# Altium PCB LogicsOnly.PcbDoc (part 2 of 3)
Units mm, origin at the board's own origin, x right, y up, seen from the top; angles counter-clockwise.
Board outline 98.85 x 158 mm, 2 copper layers (Top Layer, Bottom Layer); 236 components, 165 nets, 784 pads, 89 vias.
Unrouted connection lines stored in the file: 82.
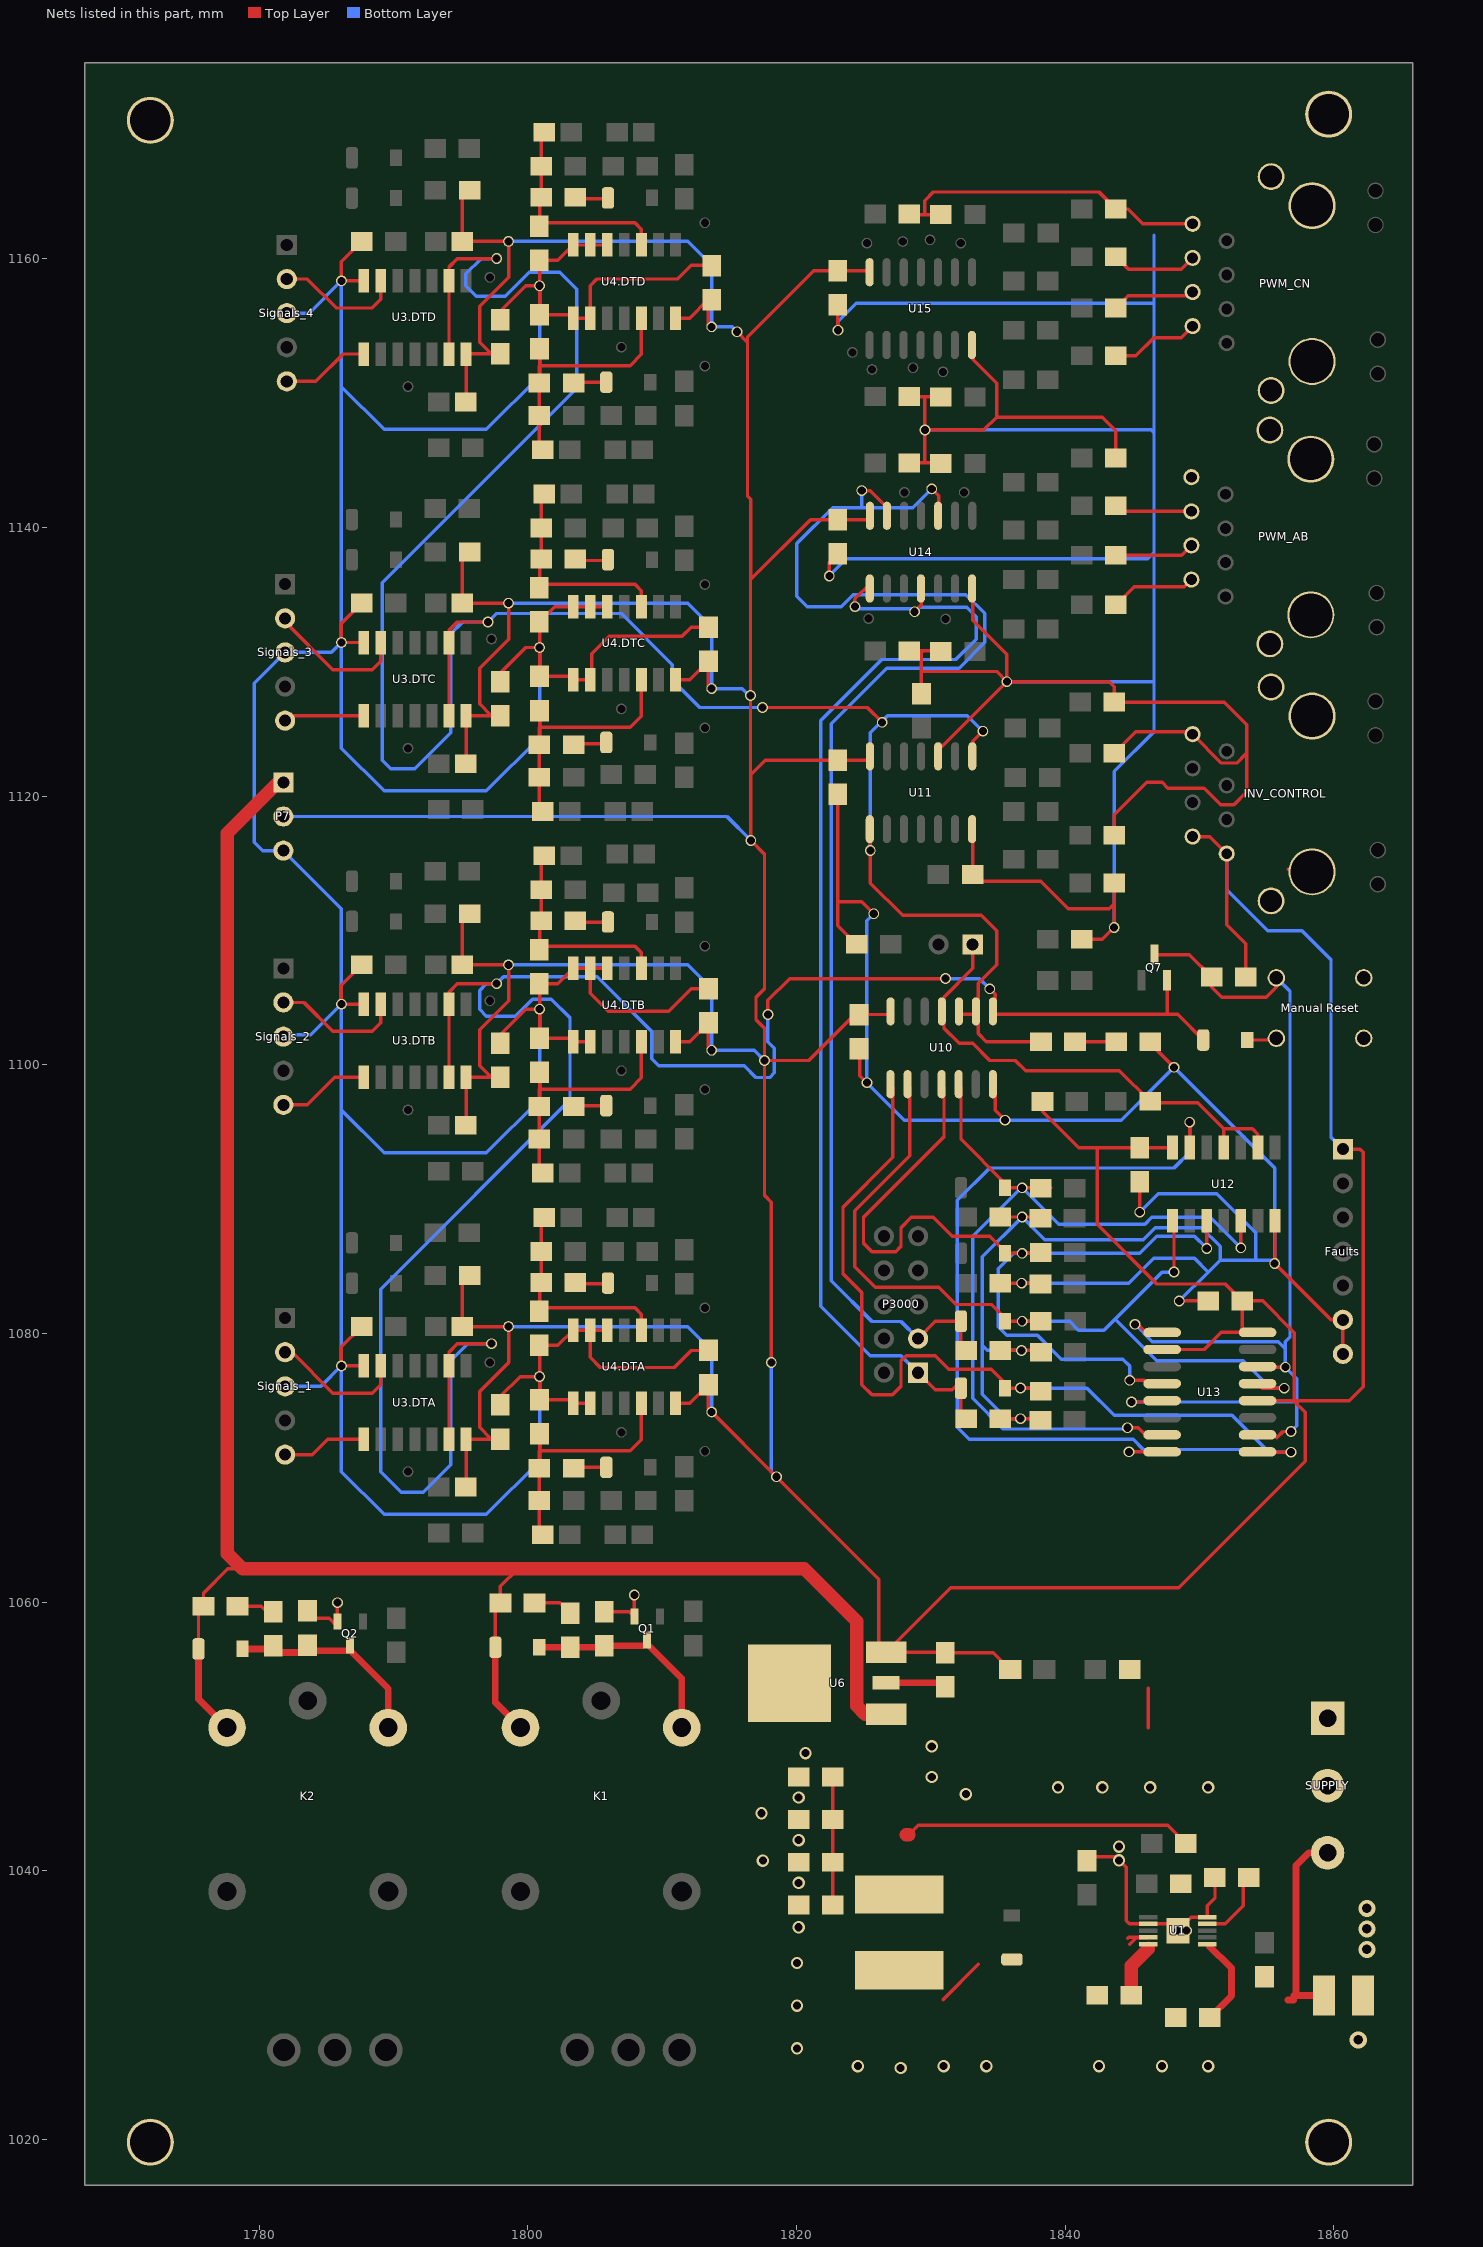
[diagram p2: the nets of this part, all layers, seen from the top]

## Via types
v1: diameter 0.8, hole 0.6, Top Layer to Bottom Layer, 59 vias
v2: diameter 0.914/0.914 (per signal layer), hole 0.6, Top Layer to Bottom Layer, 26 vias
v3: diameter 1.27, hole 0.711, Top Layer to Bottom Layer, 4 vias

## Nets (pads, with @x,y where several pads share a name; then routed paths per layer and width w, separated by ;. In a path a pad name is that pad's centre, name@x,y a point inside that pad or via, vN(x,y) a via of type N, cw(c..) or ccw(c..) an arc to the next point about the centre after c; other vN are vias at no path point)
0: C1.1 C2.1 C3.DTA.2 C3.DTB.2 C3.DTC.2 C3.DTD.2 C4.DTA.2 C4.DTB.2 C4.DTC.2 C4.DTD.2 C5.DTA.2 C5.DTB.2 C5.DTC.2 C5.DTD.2 C6.DTA.2 C6.DTB.2 C6.DTC.2 C6.DTD.2 C7.DTA.2 C7.DTB.2 C7.DTC.2 C7.DTD.2 C10.2 C11.2 C12.2 C35.2 C36.2 C37.2 C38.2 C39.2 C40.2 C42.2 Cin3.2 Cinx1.2 Cout1.2 Css1.2 D26.2 D27.2 D28.2 D29.2 Faults.6 Faults.7 INV_CONTROL.8 P7.3 pad.2 pad.4 PWM_AB.2 PWM_AB.4 PWM_AB.6 PWM_AB.8 PWM_CN.2 PWM_CN.4 PWM_CN.6 PWM_CN.8 Q1.2 Q2.2 R5.1 R12.1 R18.1 R19.1 R20.1 R21.1 R22.1 R23.1 R24.1 R25.1 R26.1 R49.2 R52.1 R53.1 R54.1 R55.1 R56.1 R57.1 R58.1 R59.1 R60.1 R61.1 R62.1 R63.1 R68.1 R69.1 R70.1 R71.1 R72.2 R73.1 Rfb2.2 Rsns1.2 Signals_1.3 Signals_2.3 Signals_3.3 Signals_4.3 SUPPLY.2 U1.5 U1.7 U3.DTA.7 U3.DTB.7 U3.DTC.7 U3.DTD.7 U4.DTA.5 U4.DTA.6 U4.DTA.7 U4.DTA.8 U4.DTA.9 U4.DTB.5 U4.DTB.6 U4.DTB.7 U4.DTB.8 U4.DTB.9 U4.DTC.5 U4.DTC.6 U4.DTC.7 U4.DTC.8 U4.DTC.9 U4.DTD.5 U4.DTD.6 U4.DTD.7 U4.DTD.8 U4.DTD.9 U6.1 U10.7 U11.7 U11.10 U12.7 U13.8 U14.7 U15.7 | length 909.2
  Top Layer w0.254: C2.1@1783.591,1058.808 1785.208,1058.808 1785.826,1058.191 Q2.2@1785.826,1058.571 v1(1785.826,1059.97) v1@1785.826,1060.044 ; C6.DTA.2@1787.64,1080.523 1786.123,1079.006 pad.4@1786.123,1077.592 U3.DTA.7@1787.779,1077.591 ; C6.DTB.2@1787.64,1107.447 1786.123,1105.93 pad.4@1786.123,1104.516 U3.DTB.7@1787.779,1104.515 ; C6.DTC.2@1787.64,1134.371 1786.123,1132.854 pad.4@1786.123,1131.44 U3.DTC.7@1787.779,1131.439 ; C6.DTD.2@1787.64,1161.295 1786.123,1159.778 pad.4@1786.123,1158.364 U3.DTD.7@1787.779,1158.363 ; C3.DTA.2@1797.949,1074.688 1797.949,1075.321 1799.427,1076.8 pad.2@1800.87,1076.8 ; C3.DTB.2@1797.949,1101.612 1797.949,1102.245 1799.848,1104.145 pad.2@1800.87,1104.145 ; C3.DTC.2@1797.949,1128.536 1797.949,1129.169 1799.848,1131.069 pad.2@1800.87,1131.069 ; C3.DTD.2@1797.949,1155.46 1797.949,1156.093 1799.848,1157.993 pad.2@1800.87,1157.993 ; C5.DTA.2@1800.851,1079.119 C5.DTA.2@1800.87,1079.119 ; C5.DTB.2@1800.851,1106.043 C5.DTB.2@1800.87,1106.043 ; C5.DTC.2@1800.851,1132.967 1801.99,1134.106 U4.DTC.7@1803.369,1134.106 U4.DTC.6@1804.639,1134.106 1805.703,1134.106 1805.909,1133.9 U4.DTC.5@1805.909,1134.106 ; C5.DTC.2@1800.87,1132.967 pad.2@1800.87,1131.069 ; U4.DTA.9@1804.639,1074.808 U4.DTA.8@1803.369,1074.808 1803.108,1075.069 C7.DTA.2@1800.87,1075.069 pad.2@1800.87,1076.8 ; U4.DTB.9@1804.639,1101.732 U4.DTB.8@1803.369,1101.732 1803.108,1101.993 C7.DTB.2@1800.87,1101.993 pad.2@1800.87,1104.145 ; C1.1@1805.689,1059.309 1807.56,1059.309 Q1.2@1807.924,1058.946 v1(1807.924,1060.546) ; U4.DTA.5@1805.909,1080.258 1805.909,1079.9 1805.551,1080.258 U4.DTA.6@1804.639,1080.258 ; U4.DTB.5@1805.909,1107.182 1805.909,1106.9 1805.627,1107.182 U4.DTB.6@1804.639,1107.182 ; U4.DTD.5@1805.909,1161.03 U4.DTD.6@1804.639,1161.03 U4.DTD.7@1803.369,1161.03 1802.23,1159.891 C5.DTD.2@1800.851,1159.891 1800.87,1159.872 pad.2@1800.87,1157.993 ; C4.DTA.2@1813.437,1078.742 1812.165,1078.742 1810.897,1077.475 1805.395,1077.475 1804.639,1078.231 U4.DTA.6@1804.639,1080.258 ; C4.DTB.2@1813.437,1105.666 1812.165,1105.666 1810.498,1104 1805.97,1104 1804.639,1105.331 U4.DTB.6@1804.639,1107.182 ; C4.DTC.2@1813.437,1132.59 1812.165,1132.59 1811.474,1131.9 1806.07,1131.9 1804.766,1130.596 1804.766,1128.782 U4.DTC.9@1804.639,1128.656 U4.DTC.8@1803.369,1128.656 1803.108,1128.917 C7.DTC.2@1800.87,1128.917 pad.2@1800.87,1131.069 ; C4.DTD.2@1813.437,1159.514 1812.165,1159.514 1811.15,1158.5 1805.146,1158.5 1804.639,1157.993 U4.DTD.9@1804.639,1155.58 U4.DTD.8@1803.369,1155.58 1803.108,1155.841 C7.DTD.2@1800.87,1155.841 pad.2@1800.87,1157.993 ; U6.1@1819.476,1053.973 U6.1@1819.503,1054 ; v1(1822.441,1136.396) 1822.441,1137.415 C38.2@1823.067,1138.04 ; C36.2@1823.067,1120.133 1823.067,1112.139 ; C40.2@1823.067,1156.582 1823.067,1154.693 v1(1823.076,1154.684) ; R49.2@1824.466,1108.973 1823.067,1110.373 1823.067,1112.139 ; C35.2@1824.718,1101.21 1824.718,1099.194 v1(1825.235,1098.677) ; v1(1825.743,1111.25) 1824.854,1112.139 1823.067,1112.139 ; R20.1@1828.403,1130.817 1829.426,1130.817 ; R22.1@1828.403,1144.806 1829.554,1144.806 1830.704,1144.806 R21.1@1830.742,1144.769 ; R23.1@1828.403,1149.759 1828.441,1149.722 1829.553,1149.722 ; R26.1@1828.403,1163.329 1828.441,1163.292 1829.553,1163.292 ; R18.1@1829.29,1127.626 1829.29,1129.284 ; 1829.553,1144.807 v1(1829.553,1147.264) ; U11.10@1830.569,1122.617 1830.569,1123.442 v1(1835.649,1128.522) ; R19.1@1830.742,1130.78 1830.704,1130.817 1829.426,1130.817 ; R24.1@1830.742,1149.722 1829.553,1149.722 ; R25.1@1830.742,1163.292 1829.553,1163.292 ; C42.2@1830.78,1054 C42.2@1831.068,1053.712 ; U11.7@1833.109,1117.917 1833.109,1117.551 1833.109,1114.174 1833.62,1113.663 1838.189,1113.663 1840.221,1111.631 1843.269,1111.631 1843.643,1112.005 ; U14.7@1833.109,1135.824 1833.109,1133.094 1835.649,1130.554 v1(1835.649,1128.522) ; U15.7@1833.109,1154.366 1833.109,1152.525 1834.887,1150.747 1834.887,1148.207 ; U10.7@1834.782,1098.307 1834.782,1096.623 v1(1835.522,1095.883) ; R68.1@1835.161,1073.667 v1(1836.665,1073.667) D26.2@1838.068,1073.667 ; R69.1@1835.161,1078.747 v1(1836.741,1078.747) D27.2@1838.068,1078.747 ; R70.1@1835.161,1083.752 v1(1836.754,1083.752) D28.2@1838.093,1083.752 ; R71.1@1835.161,1088.679 v1(1836.792,1088.679) D29.2@1838.068,1088.679 ; D26.2@1838.157,1073.756 D26.2@1838.068,1073.667 ; D27.2@1838.157,1078.658 D27.2@1838.068,1078.747 ; D28.2@1838.157,1083.688 D28.2@1838.093,1083.752 ; D29.2@1838.157,1088.59 D29.2@1838.068,1088.679 ; D26.2@1838.83,1073.667 D26.2@1838.068,1073.667 ; D27.2@1838.83,1078.747 D27.2@1838.068,1078.747 ; D29.2@1838.83,1088.679 D29.2@1838.068,1088.679 ; D28.2@1838.855,1083.752 D28.2@1838.093,1083.752 ; R5.1@1841.23,1109.354 1842.764,1109.354 v1(1843.643,1110.234) 1843.643,1112.005 ; Rsns1.2@1841.872,1041.07 1843.726,1041.07 v2(1844.006,1040.79) 1844.53,1040.266 1844.53,1036.31 1844.782,1036.058 U1.7@1846.19,1036.058 1847.887,1036.058 v1(1848.387,1035.558) ; R54.1@1843.643,1113.545 1843.643,1112.005 ; R53.1@1843.643,1117.101 1843.643,1118.609 1846.063,1121.029 1847.206,1121.029 1847.635,1120.6 1850.33,1120.6 1851.56,1119.37 1852.56,1119.37 1853.52,1120.33 1853.52,1125.31 1851.823,1127.007 R52.1@1843.643,1127.007 1843.643,1128.148 1843.269,1128.522 v1(1835.649,1128.522) ; R55.1@1843.643,1123.197 1845.248,1124.802 1849.293,1124.802 INV_CONTROL.8@1849.48,1124.615 1851.627,1122.468 1852.778,1122.468 1853.45,1123.14 ; R56.1@1843.77,1134.246 1845.121,1135.597 1848.863,1135.597 PWM_AB.2@1849.39,1136.124 ; R57.1@1843.77,1137.929 1848.655,1137.929 PWM_AB.4@1849.39,1138.664 ; R59.1@1843.77,1141.612 1844.178,1141.204 PWM_AB.6@1849.39,1141.204 ; R58.1@1843.77,1145.168 1843.77,1147.198 1842.761,1148.207 1834.887,1148.207 ; R60.1@1843.77,1152.788 1845.253,1152.788 1846.604,1154.139 1848.63,1154.139 PWM_CN.2@1849.48,1154.989 ; R61.1@1843.77,1156.344 1844.676,1157.25 1849.201,1157.25 PWM_CN.4@1849.48,1157.529 ; R63.1@1843.77,1160.154 1844.706,1159.219 1848.63,1159.219 PWM_CN.6@1849.48,1160.069 ; v1(1844.744,1071.196) U13.8@1847.212,1071.196 U13.8@1848.362,1071.196 ; v1(1845.546,1089.034) C37.2@1845.546,1091.304 ; 1846.19,1050.671 1846.19,1053.595 ; R72.2@1846.324,1101.716 1846.324,1101.591 v1(1848.095,1099.82) ; v1(1848.485,1082.43) C39.2@1850.628,1082.43 ; U1.5@1848.705,1035.876 1849.388,1036.559 U1.5@1850.584,1036.559 1850.584,1037.412 1851.143,1037.971 1851.143,1039.498 Css1.2@1851.136,1039.504 ; PWM_CN.8@1849.48,1162.609 1845.754,1162.609 1844.653,1163.71 R62.1@1843.77,1163.71 1842.51,1164.971 1830.188,1164.971 1829.553,1164.336 1829.553,1163.292 ; U12.7@1855.61,1088.401 1855.61,1085.193 1859.779,1081.024 Faults.6@1860.668,1081.024 ; Faults.7@1860.668,1078.484 Faults.6@1860.668,1081.024 ; Faults.6@1860.668,1081.659 Faults.6@1860.668,1081.024 ; pad.2@1800.87,1076.8 C5.DTA.2@1800.87,1079.119 ; C5.DTA.2@1800.87,1079.119 1802.23,1079.119 U4.DTA.7@1803.369,1080.258 U4.DTA.6@1804.639,1080.258 ; pad.2@1800.87,1104.145 C5.DTB.2@1800.87,1106.043 ; C5.DTB.2@1800.87,1106.043 1802.23,1106.043 U4.DTB.7@1803.369,1107.182 U4.DTB.6@1804.639,1107.182 ; 1829.29,1129.284 1834.887,1129.284 v1(1835.649,1128.522) ; 1829.29,1129.284 1829.29,1130.681 1829.426,1130.817 ; v1(1829.553,1147.264) 1829.553,1149.722 ; v1(1829.553,1147.264) 1833.944,1147.264 1834.887,1148.207
  Top Layer w0.5: U6.1@1826.661,1054 C42.2@1830.78,1054
  Bottom Layer w0.254: Signals_1.3@1781.928,1076.071 1784.601,1076.071 pad.4@1786.123,1077.592 ; Signals_2.3@1781.928,1102.233 1783.839,1102.233 pad.4@1786.123,1104.516 ; Signals_4.3@1782.055,1155.954 1783.712,1155.954 pad.4@1786.123,1158.364 1786.123,1150.49 ; pad.2@1800.87,1076.8 1800.87,1070.495 1796.918,1066.543 1789.298,1066.543 1786.123,1069.718 pad.4@1786.123,1077.592 ; pad.2@1800.87,1104.145 1800.87,1097.419 1796.918,1093.467 1789.298,1093.467 1786.123,1096.642 ; pad.2@1800.87,1131.069 1800.87,1124.343 1796.918,1120.391 1789.298,1120.391 1786.123,1123.566 pad.4@1786.123,1131.44 ; pad.2@1800.87,1157.993 1800.87,1151.267 1796.918,1147.315 1789.298,1147.315 1786.123,1150.49 ; v1(1822.441,1136.396) 1823.711,1137.666 1846.133,1137.666 1846.604,1138.137 ; v1(1823.076,1154.684) 1823.076,1155.319 1824.436,1156.679 1846.604,1156.679 ; v1(1825.743,1111.25) 1825.235,1110.742 v1(1825.235,1098.677) 1828.029,1095.883 v1(1835.522,1095.883) 1844.158,1095.883 v1(1848.095,1099.82) 1855.588,1092.327 v1(1855.588,1085.215) 1855.334,1085.469 1854.191,1085.469 ; v1(1829.553,1147.264) 1846.404,1147.264 1846.604,1147.064 ; v1(1835.649,1128.522) 1846.604,1128.522 ; v1(1836.665,1073.667) 1835.64,1073.667 1833.836,1075.471 1833.836,1079.119 ; v1(1836.741,1078.747) 1834.207,1078.747 1833.836,1079.119 ; v1(1836.754,1083.752) 1844.727,1083.752 1846.571,1085.596 1849.619,1085.596 1850.635,1084.58 ; v1(1843.643,1110.234) 1843.643,1121.841 1846.604,1124.802 1846.604,1128.522 ; v1(1845.546,1089.034) 1846.933,1090.422 1851.27,1090.422 1854.191,1087.501 1854.191,1085.469 ; 1846.604,1161.759 1846.604,1156.679 ; v1(1848.485,1082.43) 1850.635,1084.58 ; pad.4@1786.123,1077.592 1786.123,1096.642 ; 1786.123,1096.642 pad.4@1786.123,1104.516 ; pad.4@1786.123,1104.516 1786.123,1111.627 P7.3@1781.801,1115.949 1780.277,1115.949 1779.642,1116.584 1779.642,1128.414 Signals_3.3@1781.928,1130.7 1785.382,1130.7 pad.4@1786.123,1131.44 ; pad.4@1786.123,1131.44 1786.123,1150.49 ; 1833.836,1079.119 1833.836,1085.723 v1(1836.792,1088.679) 1838.478,1086.993 1845.809,1086.993 1846.698,1087.882 1850.127,1087.882 1851.524,1086.485 1851.524,1085.469 ; 1846.604,1128.522 1846.604,1138.137 ; 1846.604,1138.137 1846.604,1147.064 ; 1846.604,1147.064 1846.604,1156.679 ; 1850.635,1084.58 1851.524,1085.469 ; 1851.524,1085.469 1854.191,1085.469
  other v1: 1849.022,1035.558
  other v2: 1827.75,1025.33 1824.56,1025.47 1830.95,1025.47 1834.125,1025.47 1842.507,1025.47 1847.206,1025.47 1850.635,1025.47 1820.028,1026.795 1820.028,1029.97 1820.028,1033.145 1820.155,1035.812 1820.155,1039.114 1817.488,1040.765 1844.006,1041.806 1820.155,1042.289 1817.386,1044.296 1820.155,1045.464 1832.601,1045.718 1839.459,1046.226 1842.761,1046.226 1846.317,1046.226 1850.635,1046.226 1830.061,1046.988 1820.663,1048.766 1830.061,1049.274
  other v3: 1861.811,1027.43 1862.446,1034.161 1862.446,1035.685 1862.446,1037.209
+5V: C3.DTA.1 C3.DTB.1 C3.DTC.1 C3.DTD.1 C4.DTA.1 C4.DTB.1 C4.DTC.1 C4.DTD.1 C35.1 C36.1 C37.1 C38.1 C39.1 C40.1 C42.1 D32.1 D445.1 Faults.1 INV_CONTROL.1 INV_CONTROL.2 JP1.DTA.1 JP1.DTB.1 JP1.DTC.1 JP1.DTD.1 JP4.DTA.1 JP4.DTB.1 JP4.DTC.1 JP4.DTD.1 P7.2 pad.11 pad.12 R11.DTA.2 R11.DTB.2 R11.DTC.2 R11.DTD.2 R50.2 U3.DTA.14 U3.DTB.14 U3.DTC.14 U3.DTD.14 U4.DTA.14 U4.DTB.14 U4.DTC.14 U4.DTD.14 U6.2 U10.14 U11.14 U12.14 U13.2 U13.12 U13.16 U14.14 U15.14 | length 561.1
  Top Layer w0.254: JP4.DTA.1@1795.383,1068.575 JP4.DTA.1@1795.399,1068.591 ; JP4.DTB.1@1795.383,1095.499 JP4.DTB.1@1795.399,1095.515 ; JP4.DTC.1@1795.383,1122.423 JP4.DTC.1@1795.399,1122.439 ; JP4.DTD.1@1795.383,1149.347 JP4.DTD.1@1795.399,1149.363 ; JP4.DTA.1@1795.399,1068.575 JP4.DTA.1@1795.399,1068.591 ; JP4.DTB.1@1795.399,1095.499 JP4.DTB.1@1795.399,1095.515 ; JP4.DTC.1@1795.399,1122.423 JP4.DTC.1@1795.399,1122.439 ; JP4.DTD.1@1795.399,1149.347 JP4.DTD.1@1795.399,1149.363 ; R11.DTA.2@1795.66,1084.323 1795.129,1083.793 JP1.DTA.1@1795.129,1080.523 pad.11@1798.559,1080.523 1798.569,1080.513 1798.569,1077.846 1796.41,1075.687 1796.41,1073.02 C3.DTA.1@1797.283,1072.148 ; R11.DTB.2@1795.66,1111.247 1795.129,1110.717 JP1.DTB.1@1795.129,1107.447 pad.11@1798.559,1107.447 1798.569,1107.437 1798.569,1104.77 1796.41,1102.611 1796.41,1099.944 C3.DTB.1@1797.283,1099.072 ; R11.DTC.2@1795.66,1138.171 1795.129,1137.641 JP1.DTC.1@1795.129,1134.371 pad.11@1798.559,1134.371 1798.569,1134.361 1798.569,1131.694 1796.41,1129.535 1796.41,1126.868 C3.DTC.1@1797.283,1125.996 ; R11.DTD.2@1795.66,1165.095 1795.129,1164.565 JP1.DTD.1@1795.129,1161.295 pad.11@1798.559,1161.295 1798.569,1161.285 1798.569,1158.618 1796.41,1156.459 1796.41,1153.792 C3.DTD.1@1797.283,1152.92 ; C3.DTA.1@1797.949,1072.148 C3.DTA.1@1797.283,1072.148 ; C3.DTB.1@1797.949,1099.072 C3.DTB.1@1797.283,1099.072 ; C3.DTC.1@1797.949,1125.996 C3.DTC.1@1797.283,1125.996 ; C3.DTD.1@1797.949,1152.92 C3.DTD.1@1797.283,1152.92 ; U4.DTA.14@1810.989,1074.808 1812.043,1074.808 C4.DTA.1@1813.437,1076.202 1813.437,1074.408 pad.12@1813.682,1074.163 v1(1818.504,1069.341) 1826.124,1061.721 1826.124,1056.825 U6.2@1826.676,1056.273 ; U4.DTB.14@1810.989,1101.732 1812.043,1101.732 C4.DTB.1@1813.437,1103.126 1813.437,1101.332 pad.12@1813.682,1101.087 ; U4.DTC.14@1810.989,1128.656 1812.043,1128.656 C4.DTC.1@1813.437,1130.05 1813.437,1128.256 pad.12@1813.682,1128.011 ; U4.DTD.14@1810.989,1155.58 1812.043,1155.58 1813.437,1156.974 1813.437,1155.18 pad.12@1813.682,1154.935 ; v1(1815.57,1154.57) 1816.345,1153.795 ; v1(1818.123,1077.849) 1818.123,1089.787 1817.615,1090.295 v1(1817.615,1100.328) ; C35.1@1825.251,1104.004 C35.1@1825.257,1104.011 ; U11.14@1825.489,1122.617 1825.433,1122.673 C36.1@1823.067,1122.673 1817.672,1122.673 1816.599,1121.6 ; U14.14@1825.489,1140.524 1825.433,1140.58 C38.1@1823.067,1140.58 1821.037,1140.58 1816.599,1136.142 ; U15.14@1825.489,1159.066 1825.433,1159.122 C40.1@1823.067,1159.122 1821.291,1159.122 1816.345,1154.176 1816.345,1153.795 ; U10.14@1827.156,1103.75 C35.1@1824.644,1103.75 1824.32,1103.75 1820.898,1100.328 v1(1817.615,1100.328) ; D32.1@1835.903,1054.989 1834.64,1056.252 C42.1@1831.068,1056.252 1831.047,1056.273 U6.2@1826.676,1056.273 ; D445.1@1838.316,1097.28 1838.316,1096.518 1840.99,1093.844 1842.38,1093.844 ; U12.14@1847.99,1093.851 1847.984,1093.844 C37.1@1845.546,1093.844 1842.38,1093.844 ; U13.2@1848.362,1078.816 1850.332,1078.816 1851.602,1080.086 1853.162,1080.086 C39.1@1853.162,1082.424 ; INV_CONTROL.2@1849.48,1116.995 1850.75,1116.995 INV_CONTROL.1@1852.02,1115.725 1852.02,1110.42 1853.436,1109.004 R50.2@1853.436,1106.542 ; U13.12@1853.162,1075.006 U13.12@1854.312,1075.006 1856.985,1075.006 ; Faults.1@1860.668,1093.724 1861.938,1093.724 1862.17,1093.492 1862.17,1076.049 1861.127,1075.006 1856.985,1075.006 ; JP4.DTA.1@1795.399,1068.591 U3.DTA.14@1795.399,1072.141 1795.406,1072.148 C3.DTA.1@1797.283,1072.148 ; JP4.DTB.1@1795.399,1095.515 U3.DTB.14@1795.399,1099.065 1795.406,1099.072 C3.DTB.1@1797.283,1099.072 ; JP4.DTC.1@1795.399,1122.439 U3.DTC.14@1795.399,1125.989 1795.406,1125.996 C3.DTC.1@1797.283,1125.996 ; JP4.DTD.1@1795.399,1149.363 U3.DTD.14@1795.399,1152.913 1795.406,1152.92 C3.DTD.1@1797.283,1152.92 ; 1816.345,1153.795 1816.345,1142.365 1816.599,1142.111 1816.599,1136.142 ; 1816.599,1121.6 1816.57,1121.629 v1(1816.57,1127.5) 1816.57,1136.113 1816.599,1136.142 ; 1816.599,1121.6 v1(1816.599,1116.711) 1817.615,1115.695 1817.615,1105.662 1816.98,1105.027 1816.98,1103.376 1817.615,1102.741 v1(1817.615,1100.328) ; U6.2@1826.676,1056.273 1831.47,1061.067 1848.437,1061.067 1857.86,1070.49 1857.86,1074.131 1856.985,1075.006 ; 1842.38,1093.844 1842.38,1088.136 1846.825,1083.691 1851.895,1083.691 C39.1@1853.162,1082.424 ; C39.1@1853.162,1082.424 C39.1@1853.168,1082.43 1854.69,1082.43 1857.057,1080.063 1857.057,1075.078 1856.985,1075.006
  Bottom Layer w0.254: P7.2@1781.801,1118.489 1814.821,1118.489 v1(1816.599,1116.711) ; pad.11@1798.559,1080.523 1811.894,1080.523 1813.682,1078.735 pad.12@1813.682,1074.163 ; pad.11@1798.559,1107.447 1811.894,1107.447 1813.682,1105.659 pad.12@1813.682,1101.087 1816.856,1101.087 v1(1817.615,1100.328) ; pad.11@1798.559,1134.371 1811.894,1134.371 1813.682,1132.583 pad.12@1813.682,1128.011 1815.959,1128.011 1816.57,1127.4 v1(1816.57,1127.5) ; pad.11@1798.559,1161.295 1811.894,1161.295 1813.682,1159.507 pad.12@1813.682,1154.935 1815.205,1154.935 1815.306,1154.834 v1@1815.306,1154.811 ; v1(1818.123,1077.849) 1818.123,1069.722 v1(1818.504,1069.341) ; INV_CONTROL.1@1852.02,1115.725 1852.02,1113.036 1855.076,1109.98 1857.62,1109.98 1859.779,1107.821 1859.779,1094.613 Faults.1@1860.668,1093.724
+8V: C10.1 C11.1 C12.1 Cout1.1 D1.1 D2.2 D3.1 D4.2 K1.4 K2.4 L1.2 P7.1 Rfb1.1 U6.3 | length 176.9
  Top Layer w0.254: D4.2@1775.483,1056.529 1775.483,1059.327 D3.1@1775.854,1059.697 1775.854,1060.684 1777.67,1062.5 1778.756,1062.5 ; P7.1@1781.42,1121.029 P7.1@1781.801,1121.029 ; D2.2@1797.581,1056.649 1797.581,1059.581 D1.1@1797.952,1059.951 1797.952,1061.182 1799.27,1062.5 ; Cout1.1@1822.688,1037.472 C12.1@1822.688,1040.647 C11.1@1822.688,1043.822 C10.1@1822.688,1046.997 ; 1828.37,1042.7 1829.06,1043.39 1847.632,1043.39 Rfb1.1@1848.977,1042.044
  Top Layer w0.5: D4.2@1775.483,1056.529 1775.483,1052.798 K2.4@1777.61,1050.671 ; D2.2@1797.581,1056.649 1797.581,1052.544 K1.4@1799.454,1050.671
  Top Layer w1: P7.1@1781.42,1121.029 1777.63,1117.239 1777.63,1063.626 1778.756,1062.5 1799.27,1062.5 1820.57,1062.5 1824.475,1058.595 1824.475,1052.295 1825.097,1051.673 U6.3@1826.676,1051.673 ; 1828.17,1042.7 1828.37,1042.7
  Bottom Layer w0.254: P7.1@1781.166,1121.029 P7.1@1781.801,1121.029
CMD_PHB1: Signals_1.5 U3.DTA.8 | length 6.3
  Top Layer w0.254: Signals_1.5@1781.928,1070.991 1783.96,1070.991 1785.11,1072.141 U3.DTA.8@1787.779,1072.141
CMD_PHB2: Signals_2.5 U3.DTB.8 | length 6.8
  Top Layer w0.254: Signals_2.5@1781.801,1097.026 1783.576,1097.026 1785.615,1099.065 U3.DTB.8@1787.779,1099.065
CMD_PHB3: Signals_3.5 U3.DTC.8 | length 5.9
  Top Layer w0.254: Signals_3.5@1781.928,1125.989 U3.DTC.8@1787.779,1125.989
CMD_PHB4: Signals_4.5 U3.DTD.8 | length 6.6
  Top Layer w0.254: Signals_4.5@1782.055,1150.874 1784.214,1150.874 1786.253,1152.913 U3.DTD.8@1787.779,1152.913
CMD_PHT1: Signals_1.2 U3.DTA.6 | length 10
  Top Layer w0.254: Signals_1.2@1781.928,1078.611 1782.447,1078.611 1785.488,1075.57 1788.414,1075.57 1789.049,1076.205 U3.DTA.6@1789.049,1077.591
CMD_PHT2: Signals_2.2 U3.DTB.6 | length 9.8
  Top Layer w0.254: Signals_2.2@1781.801,1104.646 1783.336,1104.646 1785.488,1102.494 1788.414,1102.494 1789.049,1103.129 U3.DTB.6@1789.049,1104.515
CMD_PHT3: Signals_3.2 U3.DTC.6 | length 10.5
  Top Layer w0.254: Signals_3.2@1781.928,1133.24 1781.928,1132.967 1785.477,1129.418 1788.414,1129.418 1789.049,1130.053 U3.DTC.6@1789.049,1131.439
CMD_PHT4: Signals_4.2 U3.DTD.6 | length 9.5
  Top Layer w0.254: Signals_4.2@1782.055,1158.494 1783.579,1158.494 1785.731,1156.342 1788.414,1156.342 1789.049,1156.977 U3.DTD.6@1789.049,1158.363
EARTH: Fix1.0 Fix2.0 Fix3.0 Fix4.0 INV_CONTROL.9 PWM_AB.9 PWM_CN.9 SUPPLY.1 | length 1.2
  Top Layer w0.254: 1856.604,1114.552 INV_CONTROL.9@1857.804,1114.552
EN-PH2: D21.2 Q7.2 U3.DTA.2 U3.DTA.13 U3.DTB.2 U3.DTB.13 U10.8 | length 157.9
  Top Layer w0.254: U3.DTA.13@1794.129,1072.141 U3.DTA.2@1794.129,1077.591 1794.129,1078.62 1794.755,1079.246 v1(1797.295,1079.246) ; U3.DTB.13@1794.129,1099.065 U3.DTB.2@1794.129,1104.515 1794.129,1105.417 1794.755,1106.043 v1(1797.676,1106.043) ; v1(1817.869,1103.757) 1817.869,1104.799 1819.494,1106.424 v1(1831.077,1106.424) ; v1(1834.379,1105.662) 1834.782,1105.259 1834.782,1103.757 1847.587,1103.757 ; Q7.2@1847.587,1106.297 1847.587,1103.757 ; D21.2@1850.27,1101.852 1848.365,1103.757 1847.587,1103.757
  Bottom Layer w0.254: v1(1797.295,1079.246) 1795.517,1079.246 1794.247,1077.976 1794.247,1070.229 1792.215,1068.197 1790.564,1068.197 1789.04,1069.721 1789.04,1083.31 1803.137,1097.407 1803.137,1103.503 1801.74,1104.9 1800.343,1104.9 1799.073,1103.63 1796.914,1103.63 1796.406,1104.138 1796.406,1105.535 1796.914,1106.043 v1(1797.676,1106.043) 1798.184,1106.551 1805.169,1106.551 1809.233,1102.487 1809.233,1100.455 1809.741,1099.947 1816.091,1099.947 1816.98,1099.058 1817.996,1099.058 1818.354,1099.416 1818.354,1101.24 1817.869,1101.725 v1(1817.869,1103.757) ; v1(1831.077,1106.424) 1833.617,1106.424 v1(1834.379,1105.662)
EN-PH4: D9.1 pad.30 U3.DTC.2 U3.DTC.13 U3.DTD.2 U3.DTD.13 U10.9 U10.10 U11.1 U11.8 | length 175.1
  Top Layer w0.254: U3.DTC.13@1794.129,1125.989 U3.DTC.2@1794.129,1131.439 1794.129,1132.341 1794.755,1132.967 v1(1797.041,1132.967) ; U3.DTD.13@1794.129,1152.913 U3.DTD.2@1794.129,1158.363 1794.129,1159.392 1794.755,1160.018 v1(1797.676,1160.018) ; v1(1817.47,1126.6) 1825.27,1126.6 v1(1826.37,1125.5) ; U11.1@1825.489,1117.917 v1(1825.489,1115.949) 1825.489,1113.536 1827.902,1111.123 1833.744,1111.123 1834.887,1109.98 1834.887,1107.44 1833.512,1106.065 U10.9@1833.512,1103.757 ; U10.10@1832.242,1103.757 U10.9@1833.512,1103.757 ; U11.8@1833.109,1122.617 1833.109,1124.077 pad.30@1833.744,1124.712 ; D9.1@1838.189,1101.725 1834.125,1101.725 1833.512,1102.338 U10.9@1833.512,1103.757
  Bottom Layer w0.254: v1(1797.676,1160.018) 1796.533,1160.018 1795.39,1158.875 1795.39,1157.986 1796.152,1157.224 1798.311,1157.224 1800.089,1159.002 1802.375,1159.002 1803.645,1157.732 1803.645,1150.366 1789.167,1135.888 1789.167,1122.68 1789.802,1122.045 1791.58,1122.045 1794.247,1124.712 1794.247,1132.078 1795.136,1132.967 v1(1797.041,1132.967) 1797.676,1133.602 1806.947,1133.602 1810.757,1129.792 1810.757,1128.649 1812.806,1126.6 v1(1817.47,1126.6) ; v1(1825.489,1115.949) 1825.489,1124.719 1826.77,1126 1832.71,1126 pad.30@1833.871,1124.839
FAULT: JP5.1 R48.1 U10.11 U12.9 U12.11 | length 36.1
  Top Layer w0.254: JP5.1@1833.109,1108.964 1833.109,1107.186 1830.972,1105.049 1830.972,1102.719 1832.093,1101.598 1833.109,1101.598 1834.379,1100.328 1836.284,1100.328 1837.046,1099.566 1844.034,1099.566 R48.1@1846.31,1097.289 ; R48.1@1846.31,1097.194 1849.854,1097.194 1851.8,1095.248 ; U12.11@1851.8,1093.851 1851.8,1095.248 ; U12.9@1854.34,1093.851 1854.34,1094.845 1853.937,1095.248 1851.8,1095.248
FAULT-RESET': "Manual Reset.1" Q7.3 R50.1 U13.1 U13.5 U13.10 U13.14 | length 83.5
  Top Layer w0.254: v1(1844.93,1074.91) 1847.116,1074.91 U13.5@1847.212,1075.006 ; v1(1845.2,1080.69) 1845.407,1080.69 1845.987,1080.11 1846.139,1080.262 1846.341,1080.06 1846.366,1080.086 U13.1@1847.212,1080.086 U13.1@1848.362,1080.086 ; Q7.3@1846.637,1108.197 1849.24,1108.197 R50.1@1850.896,1106.542 1850.896,1105.782 1851.651,1105.027 1854.953,1105.027 1855.715,1105.789 1855.715,1106.479 ; U13.10@1853.162,1072.466 U13.10@1854.312,1072.466 U13.10@1854.904,1072.466 ; U13.14@1853.162,1077.546 1853.24,1077.468 1853.272,1077.5 v1(1856.38,1077.5) ; U13.10@1855.648,1072.31 1855.728,1072.23 1856.208,1072.71 v1(1856.8,1072.71)
  Bottom Layer w0.254: v1(1844.93,1074.91) 1856.94,1074.91 1857.21,1075.18 ; v1(1845.2,1080.69) 1846.487,1079.403 1855.842,1079.403 1856.38,1078.865 ; 1855.715,1106.479 1856.731,1105.463 1856.731,1079.754 1856.38,1079.403 1856.38,1078.865 ; v1@1856.8,1072.5 v1(1856.8,1072.71) 1857.24,1073.15 1857.24,1076.64 v1(1856.38,1077.5) 1856.38,1078.865
FAULT_PH1: D22.1 R64.2 U10.1 U12.13 U13.9 | length 131.4
  Top Layer w0.254: U10.1@1827.162,1098.307 1827.162,1093.111 1823.457,1089.406 1823.457,1084.453 1824.854,1083.056 1824.854,1076.198 1825.616,1075.436 1827.14,1075.436 1827.775,1076.071 1827.775,1077.976 1828.156,1078.357 1830.315,1078.357 1831.331,1077.341 1834.506,1077.341 1835.506,1076.341 D22.1@1835.506,1075.941 R64.2@1838.119,1075.941 ; R64.2@1838.182,1075.877 R64.2@1838.119,1075.941 ; R64.2@1838.881,1075.941 R64.2@1838.119,1075.941 ; U12.13@1849.26,1093.851 v1(1849.26,1095.734) ; U13.9@1853.162,1071.196 U13.9@1854.312,1071.196 1854.338,1071.17 v1(1856.8,1071.17)
  Bottom Layer w0.254: v1(1836.665,1075.944) 1841.618,1075.944 1843.65,1073.912 1852.413,1073.912 1854.953,1071.372 ; v1(1849.26,1095.734) 1849.26,1093.492 1848.095,1092.327 1834.379,1092.327 1831.966,1089.914 1831.966,1073.023 1832.855,1072.134 1845.047,1072.134 1845.809,1071.372 1854.953,1071.372 ; v1(1856.8,1071.17) 1855.155,1071.17 1854.953,1071.372
FAULT_PH2: D23.1 R65.2 U10.2 U12.1 U13.13 | length 66.7
  Top Layer w0.254: U10.2@1828.432,1098.307 1828.432,1093.238 1824.346,1089.152 1824.346,1084.961 1825.87,1083.437 1830.569,1083.437 1831.839,1082.167 1834.506,1082.167 1835.506,1081.167 D23.1@1835.506,1080.919 v1(1836.792,1080.919) R65.2@1838.055,1080.919 ; R65.2@1838.182,1080.792 R65.2@1838.055,1080.919 ; R65.2@1838.817,1080.919 R65.2@1838.055,1080.919 ; U12.1@1847.99,1088.401 1848.095,1088.296 v1(1848.095,1084.58) ; U13.13@1853.162,1076.276 U13.13@1854.312,1076.276 1854.649,1075.939 v1(1856.298,1075.939)
  Bottom Layer w0.254: v1(1836.792,1080.919) 1840.326,1080.919 1840.983,1080.262 1842.882,1080.262 1847.2,1084.58 v1(1848.095,1084.58) ; 1843.761,1081.041 1846.825,1077.976 1853.253,1077.976 1855.29,1075.939 v1(1856.298,1075.939)
FAULT_PH3: D24.1 R66.2 U10.4 U12.3 U13.4 | length 70.4
  Top Layer w0.254: U10.4@1830.972,1098.307 1830.972,1094.635 1824.981,1088.644 1824.981,1086.739 1825.616,1086.104 1827.394,1086.104 1827.775,1086.485 1827.775,1087.882 1828.537,1088.644 1830.188,1088.644 1831.585,1087.247 1834.379,1087.247 1835.506,1086.12 D24.1@1835.506,1085.977 v1(1836.792,1085.977) R66.2@1838.119,1085.977 ; R66.2@1838.182,1086.041 R66.2@1838.119,1085.977 ; R66.2@1838.881,1085.977 R66.2@1838.119,1085.977 ; v1(1844.8,1076.52) 1845.868,1076.52 1846.112,1076.276 U13.4@1847.212,1076.276 U13.4@1848.362,1076.276 ; v1(1850.53,1086.336) U12.3@1850.53,1088.401
  Bottom Layer w0.254: v1(1844.8,1076.52) 1844.8,1077.588 1844.285,1078.103 1839.713,1078.103 1837.935,1079.881 1835.649,1079.881 1835.014,1080.516 1835.014,1084.834 1836.157,1085.977 v1(1836.792,1085.977) 1845.555,1085.977 1846.825,1087.247 1849.619,1087.247 v1(1850.53,1086.336)
FAULT_PH4: D25.1 R67.2 U10.5 U12.5 U13.7 | length 65.5
  Top Layer w0.254: U10.5@1832.242,1098.307 1832.242,1094.464 1835.506,1091.2 D25.1@1835.506,1090.851 v1(1836.792,1090.851) R67.2@1838.144,1090.851 ; R67.2@1838.182,1090.812 R67.2@1838.144,1090.851 ; R67.2@1838.906,1090.851 R67.2@1838.144,1090.851 ; v1(1844.64,1072.99) 1845.44,1072.99 1845.964,1072.466 U13.7@1847.212,1072.466 ; U13.7@1848.284,1072.388 U13.7@1848.362,1072.466 ; v1(1853.07,1086.38) U12.5@1853.07,1088.401
  Bottom Layer w0.254: v1(1844.64,1072.99) 1844.546,1072.896 1835.395,1072.896 1833.109,1075.182 1833.109,1087.247 1836.713,1090.851 v1(1836.792,1090.851) 1839.507,1088.136 1845.936,1088.136 1846.444,1088.644 1850.807,1088.644 v1(1853.07,1086.38)
NetC1_2: C1.2 D2.1 K1.5 Q1.3 R1.2 | length 16.3
  Top Layer w0.254: R1.2@1803.142,1056.649 R1.2@1803.149,1056.642 ; C1.2@1805.562,1056.642 C1.2@1805.689,1056.769 ; 1808.497,1056.769 Q1.3@1808.874,1057.146
  Top Layer w0.5: D2.1@1800.851,1056.649 R1.2@1803.142,1056.649 ; R1.2@1803.149,1056.642 C1.2@1805.562,1056.642 ; C1.2@1805.689,1056.769 1808.497,1056.769 ; Q1.3@1808.874,1057.654 Q1.3@1808.874,1057.146 1808.874,1056.914 1811.454,1054.333 K1.5@1811.454,1050.671
NetC2_2: C2.2 D4.1 K2.5 Q2.3 R3.2 | length 15.6
  Top Layer w0.254: R3.2@1780.79,1056.529 R3.2@1781.051,1056.268 ; C2.2@1783.591,1056.268 C2.2@1783.714,1056.391
  Top Layer w0.5: D4.1@1778.753,1056.529 R3.2@1780.79,1056.529 ; R3.2@1781.051,1056.268 C2.2@1783.591,1056.268 ; C2.2@1783.714,1056.391 Q2.3@1786.776,1056.391 ; Q2.3@1786.776,1056.899 Q2.3@1786.776,1056.771 1786.776,1056.406 1789.61,1053.571 K2.5@1789.61,1050.671
NetC5.DTA_1: C5.DTA.1 JP3.DTA.1 R7.DTA.2 R10.DTA.2 U4.DTA.3 | length 17.9
  Top Layer w0.254: C5.DTA.1@1800.87,1081.659 C5.DTA.1@1800.87,1081.92 ; R7.DTA.2@1800.987,1083.698 R7.DTA.2@1800.987,1083.805 R7.DTA.2@1800.968,1083.805 ; JP3.DTA.1@1801.236,1088.641 1800.987,1088.393 R10.DTA.2@1800.987,1086.111 1800.733,1086.111 1800.987,1085.857 1800.987,1083.825 R7.DTA.2@1800.968,1083.805 ; U4.DTA.3@1808.449,1080.258 1808.449,1081.444 1807.972,1081.92 C5.DTA.1@1800.87,1081.92 ; C5.DTA.1@1800.87,1081.92 R7.DTA.2@1800.87,1083.307 ; R7.DTA.2@1800.87,1083.307 1800.372,1083.805 R7.DTA.2@1800.968,1083.805 ; R7.DTA.2@1800.87,1083.307 1800.87,1083.707 R7.DTA.2@1800.968,1083.805
NetC5.DTB_1: C5.DTB.1 JP3.DTB.1 R7.DTB.2 R10.DTB.2 U4.DTB.3 | length 17.9
  Top Layer w0.254: C5.DTB.1@1800.87,1108.583 C5.DTB.1@1800.87,1108.844 ; R7.DTB.2@1800.987,1110.622 R7.DTB.2@1800.987,1110.729 R7.DTB.2@1800.968,1110.729 ; JP3.DTB.1@1801.236,1115.565 1800.987,1115.317 R10.DTB.2@1800.987,1113.035 1800.733,1113.035 1800.987,1112.781 1800.987,1110.749 R7.DTB.2@1800.968,1110.729 ; U4.DTB.3@1808.449,1107.182 1808.449,1108.368 1807.972,1108.844 C5.DTB.1@1800.87,1108.844 ; C5.DTB.1@1800.87,1108.844 R7.DTB.2@1800.87,1110.231 ; R7.DTB.2@1800.87,1110.231 1800.372,1110.729 R7.DTB.2@1800.968,1110.729 ; R7.DTB.2@1800.87,1110.231 1800.87,1110.631 R7.DTB.2@1800.968,1110.729
NetC5.DTC_1: C5.DTC.1 JP3.DTC.1 R7.DTC.2 R10.DTC.2 U4.DTC.3 | length 17.9
  Top Layer w0.254: C5.DTC.1@1800.87,1135.507 C5.DTC.1@1800.87,1135.768 ; R7.DTC.2@1800.987,1137.546 R7.DTC.2@1800.987,1137.653 R7.DTC.2@1800.968,1137.653 ; JP3.DTC.1@1801.236,1142.489 1800.987,1142.241 R10.DTC.2@1800.987,1139.959 1800.733,1139.959 1800.987,1139.705 1800.987,1137.673 R7.DTC.2@1800.968,1137.653 ; U4.DTC.3@1808.449,1134.106 1808.449,1135.292 1807.972,1135.768 C5.DTC.1@1800.87,1135.768 ; C5.DTC.1@1800.87,1135.768 R7.DTC.2@1800.87,1137.155 ; R7.DTC.2@1800.87,1137.155 1800.372,1137.653 R7.DTC.2@1800.968,1137.653 ; R7.DTC.2@1800.87,1137.155 1800.87,1137.555 R7.DTC.2@1800.968,1137.653
NetC5.DTD_1: C5.DTD.1 JP3.DTD.1 R7.DTD.2 R10.DTD.2 U4.DTD.3 | length 17.9
  Top Layer w0.254: C5.DTD.1@1800.87,1162.431 C5.DTD.1@1800.87,1162.692 ; R7.DTD.2@1800.987,1164.47 R7.DTD.2@1800.987,1164.577 R7.DTD.2@1800.968,1164.577 ; JP3.DTD.1@1801.236,1169.413 1800.987,1169.165 R10.DTD.2@1800.987,1166.883 1800.733,1166.883 1800.987,1166.629 1800.987,1164.597 R7.DTD.2@1800.968,1164.577 ; U4.DTD.3@1808.449,1161.03 1808.449,1162.216 1807.972,1162.692 C5.DTD.1@1800.87,1162.692 ; C5.DTD.1@1800.87,1162.692 R7.DTD.2@1800.87,1164.079 ; R7.DTD.2@1800.87,1164.079 1800.372,1164.577 R7.DTD.2@1800.968,1164.577 ; R7.DTD.2@1800.87,1164.079 1800.87,1164.479 R7.DTD.2@1800.968,1164.577
NetC7.DTA_1: C7.DTA.1 JP7.DTA.1 R14.DTA.2 R17.DTA.2 U4.DTA.12 | length 20.9
  Top Layer w0.254: JP7.DTA.1@1800.86,1064.771 JP7.DTA.1@1801.109,1065.019 JP7.DTA.1@1800.86,1065.268 ; R17.DTA.2@1800.86,1067.569 JP7.DTA.1@1800.86,1065.268 ; 1800.87,1071.242 1800.87,1071.261 ; C7.DTA.1@1800.87,1072.529 1800.87,1071.261 ; U4.DTA.12@1808.449,1074.808 1808.449,1072.109 1807.617,1071.277 1800.886,1071.277 1800.87,1071.261 ; JP7.DTA.1@1800.86,1065.268 R14.DTA.2@1800.86,1069.982 1800.86,1071.252 1800.87,1071.261
NetC7.DTB_1: C7.DTB.1 JP7.DTB.1 R14.DTB.2 R17.DTB.2 U4.DTB.12 | length 20.9
  Top Layer w0.254: JP7.DTB.1@1800.86,1091.695 JP7.DTB.1@1801.109,1091.943 JP7.DTB.1@1800.86,1092.192 ; R17.DTB.2@1800.86,1094.493 JP7.DTB.1@1800.86,1092.192 ; 1800.87,1098.166 1800.87,1098.185 ; C7.DTB.1@1800.87,1099.453 1800.87,1098.185 ; U4.DTB.12@1808.449,1101.732 1808.449,1099.033 1807.617,1098.201 1800.886,1098.201 1800.87,1098.185 ; JP7.DTB.1@1800.86,1092.192 R14.DTB.2@1800.86,1096.906 1800.86,1098.176 1800.87,1098.185
NetC7.DTC_1: C7.DTC.1 JP7.DTC.1 R14.DTC.2 R17.DTC.2 U4.DTC.12 | length 20.9
  Top Layer w0.254: JP7.DTC.1@1800.86,1118.619 JP7.DTC.1@1801.109,1118.867 JP7.DTC.1@1800.86,1119.116 ; R17.DTC.2@1800.86,1121.417 JP7.DTC.1@1800.86,1119.116 ; 1800.87,1125.09 1800.87,1125.109 ; C7.DTC.1@1800.87,1126.377 1800.87,1125.109 ; U4.DTC.12@1808.449,1128.656 1808.449,1125.957 1807.617,1125.125 1800.886,1125.125 1800.87,1125.109 ; JP7.DTC.1@1800.86,1119.116 R14.DTC.2@1800.86,1123.83 1800.86,1125.1 1800.87,1125.109
NetC7.DTD_1: C7.DTD.1 JP7.DTD.1 R14.DTD.2 R17.DTD.2 U4.DTD.12 | length 20.9
  Top Layer w0.254: JP7.DTD.1@1800.86,1145.543 JP7.DTD.1@1801.109,1145.791 JP7.DTD.1@1800.86,1146.04 ; R17.DTD.2@1800.86,1148.341 JP7.DTD.1@1800.86,1146.04 ; 1800.87,1152.014 1800.87,1152.033 ; C7.DTD.1@1800.87,1153.301 1800.87,1152.033 ; U4.DTD.12@1808.449,1155.58 1808.449,1152.881 1807.617,1152.049 1800.886,1152.049 1800.87,1152.033 ; JP7.DTD.1@1800.86,1146.04 R14.DTD.2@1800.86,1150.754 1800.86,1152.024 1800.87,1152.033
NetCbst1_1: Cbst1.1 U1.10 | length 4.3
  Top Layer w0.508: 1846.19,1034.22 U1.10@1846.19,1034.489
  Top Layer w1: Cbst1.1@1844.913,1030.741 1844.913,1032.943 1846.19,1034.22
NetCbst1_2: Cbst1.2 D33.2 L1.1 U1.9 | length 6.8
  Top Layer w0.254: 1830.899,1030.427 1833.515,1033.043 ; 1844.66,1035 1844.718,1035.058 U1.9@1846.19,1035.058 1846.157,1035.025 1845.285,1035.025 1844.81,1034.55
NetCin3_1: Cin3.1 Cinx1.1 Rt1.1 SUPPLY.3 U1.1 | length 22.5
  Top Layer w0.254: Rt1.1@1854.572,1032.129 Rt1.1@1854.826,1032.129
  Top Layer w0.508: U1.1@1850.676,1034.466 1852.37,1032.771 1852.37,1030.705 Cinx1.1@1850.755,1029.09 ; Rt1.1@1854.826,1032.256 Rt1.1@1855.207,1032.256 ; 1856.555,1030.4 1857.002,1030.4 ; 1857.002,1030.732 1857.17,1030.732 ; Cin3.1@1859.271,1030.732 1857.17,1030.732 ; SUPPLY.3@1859.525,1041.353 1858.123,1041.353 1857.17,1040.4 1857.17,1030.732
NetCss1_1: Css1.1 U1.4 | length 4.9
  Top Layer w0.254: U1.4@1850.584,1036.058 1851.897,1036.058 1853.251,1037.412 Css1.1@1853.251,1039.114
NetD1_2: D1.2 R1.1 | length 3
  Top Layer w0.254: D1.2@1800.492,1059.951 1802.38,1059.951 R1.1@1803.149,1059.182
NetD3_2: D3.2 R3.1 | length 3
  Top Layer w0.254: D3.2@1778.394,1059.697 1780.162,1059.697 R3.1@1781.051,1058.808
NetD5.DTA_2: D5.DTA.2 R7.DTA.1 | length 2.5
  Top Layer w0.254: R7.DTA.1@1803.527,1083.698 1805.9,1083.698 D5.DTA.2@1805.963,1083.761
NetD5.DTB_2: D5.DTB.2 R7.DTB.1 | length 2.5
  Top Layer w0.254: R7.DTB.1@1803.527,1110.622 1805.9,1110.622 D5.DTB.2@1805.963,1110.685
NetD5.DTC_2: D5.DTC.2 R7.DTC.1 | length 2.5
  Top Layer w0.254: R7.DTC.1@1803.527,1137.546 1805.9,1137.546 D5.DTC.2@1805.963,1137.609
NetD5.DTD_2: D5.DTD.2 R7.DTD.1 | length 2.5
  Top Layer w0.254: R7.DTD.1@1803.527,1164.47 1805.9,1164.47 D5.DTD.2@1805.963,1164.533
NetD8.DTA_2: D8.DTA.2 R14.DTA.1 | length 2.5
  Top Layer w0.254: R14.DTA.1@1803.4,1069.982 1803.4,1070.045 D8.DTA.2@1805.836,1070.045
NetD8.DTB_2: D8.DTB.2 R14.DTB.1 | length 2.5
  Top Layer w0.254: R14.DTB.1@1803.4,1096.906 1803.4,1096.969 D8.DTB.2@1805.836,1096.969
NetD8.DTC_2: D8.DTC.2 R14.DTC.1 | length 2.5
  Top Layer w0.254: R14.DTC.1@1803.4,1123.83 1803.4,1123.893 D8.DTC.2@1805.836,1123.893
NetD8.DTD_2: D8.DTD.2 R14.DTD.1 | length 2.5
  Top Layer w0.254: R14.DTD.1@1803.4,1150.754 1803.4,1150.817 D8.DTD.2@1805.836,1150.817
NetD9_2: D9.2 R72.1 | length 3.1
  Top Layer w0.254: D9.2@1840.729,1101.725 1843.774,1101.725 R72.1@1843.784,1101.716
NetD21_1: "Manual Reset.2" D21.1 | length 2.2
  Top Layer w0.254: D21.1@1853.54,1101.852 1855.588,1101.852 1855.715,1101.979
NetD22_2: D22.2 P3000.1 pad.22 pad.23 R68.2 U14.1 U14.4 | length 89.1
  Top Layer w0.254: pad.22@1824.346,1134.11 1824.346,1134.681 U14.1@1825.489,1135.824 ; pad.23@1828.791,1133.729 1829.299,1134.237 U14.4@1829.299,1135.824 ; P3000.1@1829.045,1077.087 1830.315,1075.817 1831.604,1075.817 D22.2@1832.236,1076.449 ; D22.2@1832.236,1075.941 1832.236,1074.052 R68.2@1832.621,1073.667
  Bottom Layer w0.254: pad.22@1824.346,1134.11 1824.516,1133.94 1828.58,1133.94 pad.23@1828.791,1133.729 1829.112,1134.05 1832.661,1134.05 1833.363,1133.348 1833.363,1131.697 1831.839,1130.173 1826.343,1130.173 1821.806,1125.636 1821.806,1082.04 1825.489,1078.357 1827.775,1078.357 P3000.1@1829.045,1077.087
NetD23_2: D23.2 P3000.3 pad.24 pad.25 R69.2 U14.10 U14.13 | length 110.1
  Top Layer w0.254: pad.24@1824.854,1142.746 1825.489,1142.746 1826.759,1141.476 U14.13@1826.759,1140.524 ; P3000.3@1829.045,1079.627 1830.337,1080.919 D23.2@1832.236,1080.919 1832.236,1079.132 R69.2@1832.621,1078.747 ; pad.25@1829.934,1143 pad.25@1830.061,1142.873 1830.569,1142.365 U14.10@1830.569,1140.524
  Bottom Layer w0.254: pad.24@1824.854,1142.746 1824.854,1141.476 ; P3000.3@1829.045,1079.627 1827.775,1080.897 1825.616,1080.897 1822.568,1083.945 1822.568,1125.398 1826.708,1129.538 1832.093,1129.538 1833.998,1131.443 1833.998,1133.602 1832.601,1134.999 1824.219,1134.999 1823.33,1134.11 1820.79,1134.11 1820.028,1134.872 1820.028,1138.809 1822.695,1141.476 1824.854,1141.476 ; pad.25@1830.061,1142.873 1828.664,1141.476 1824.854,1141.476